# Altium PCB PCB_COF_1.2.PcbDoc
Units mil, origin at the board's own origin, x right, y up, seen from the top; angles counter-clockwise.
Board outline 2760 x 3645 mil, 2 copper layers (Top Layer, Bottom Layer), stack 12.8 mil thick; 59 components, 26 nets, 178 pads, 381 vias.
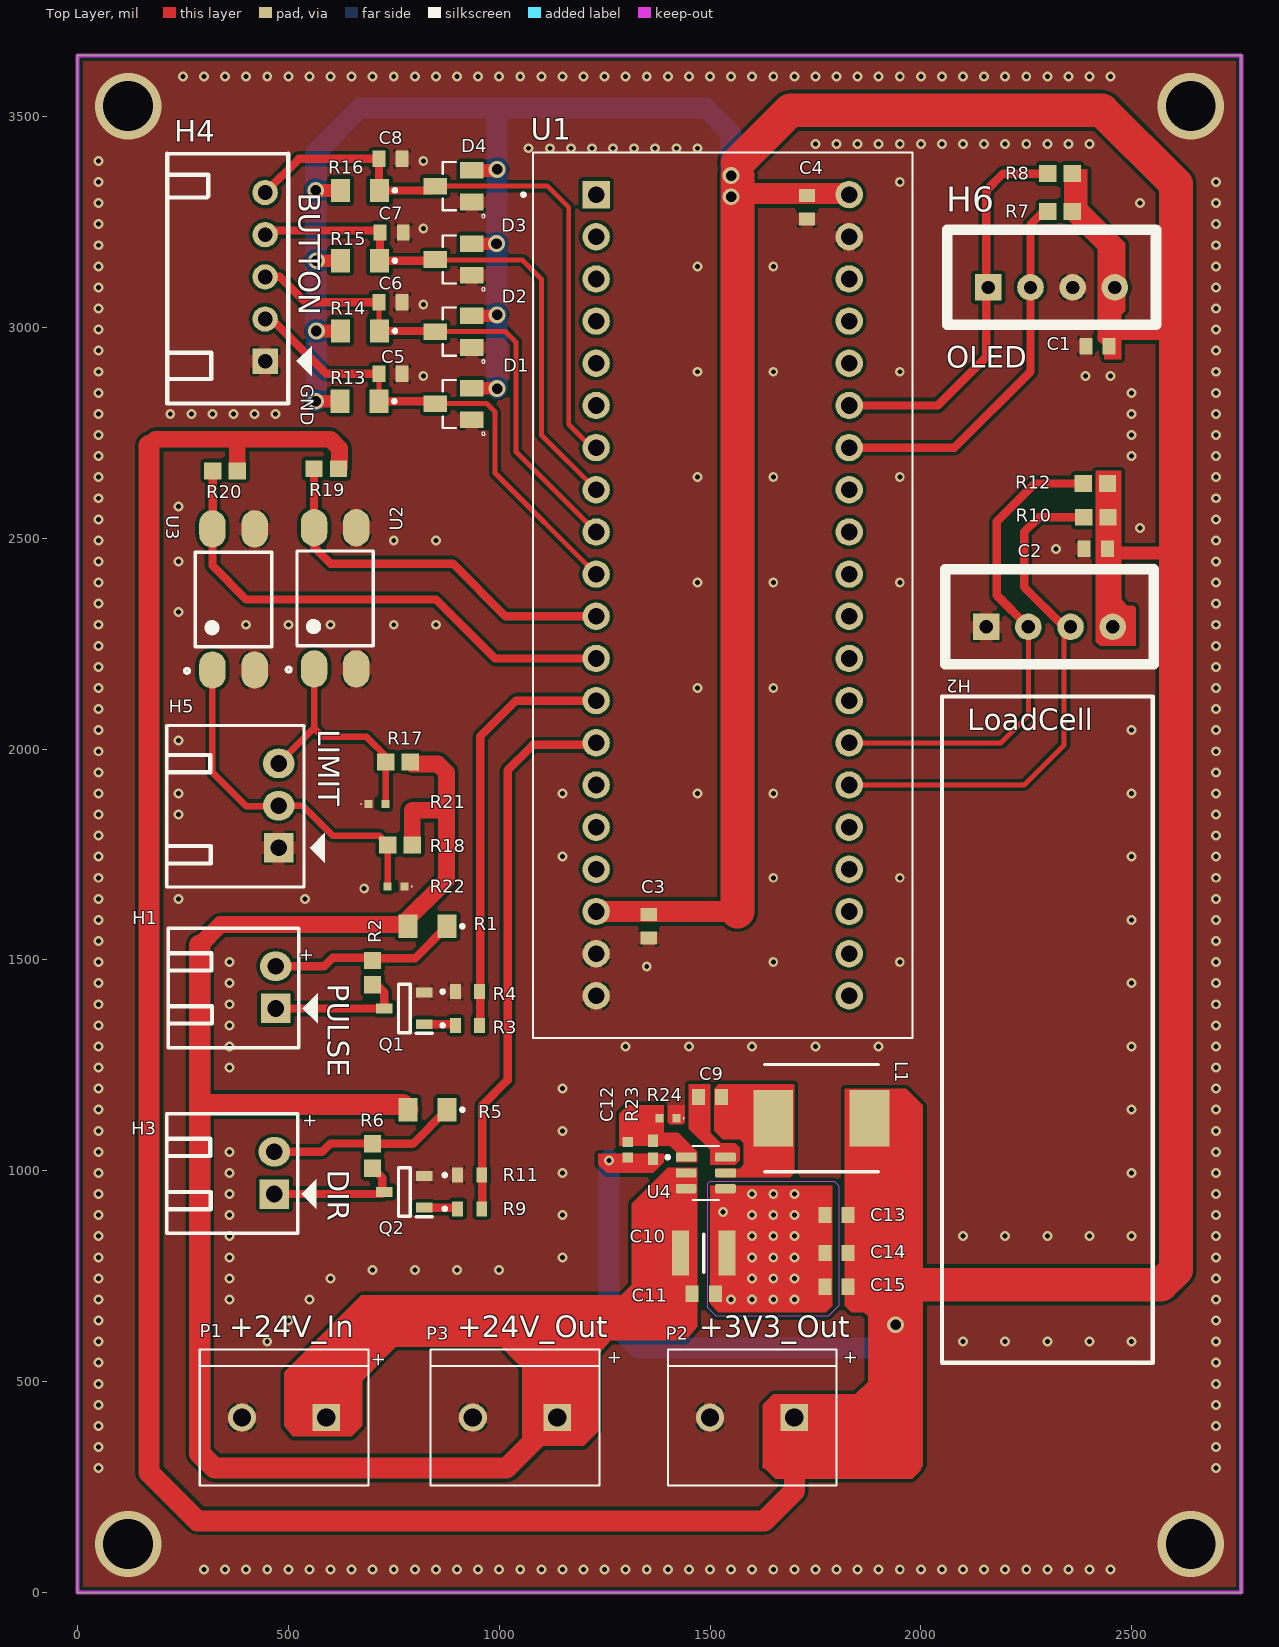
[diagram p0: Top Layer view]
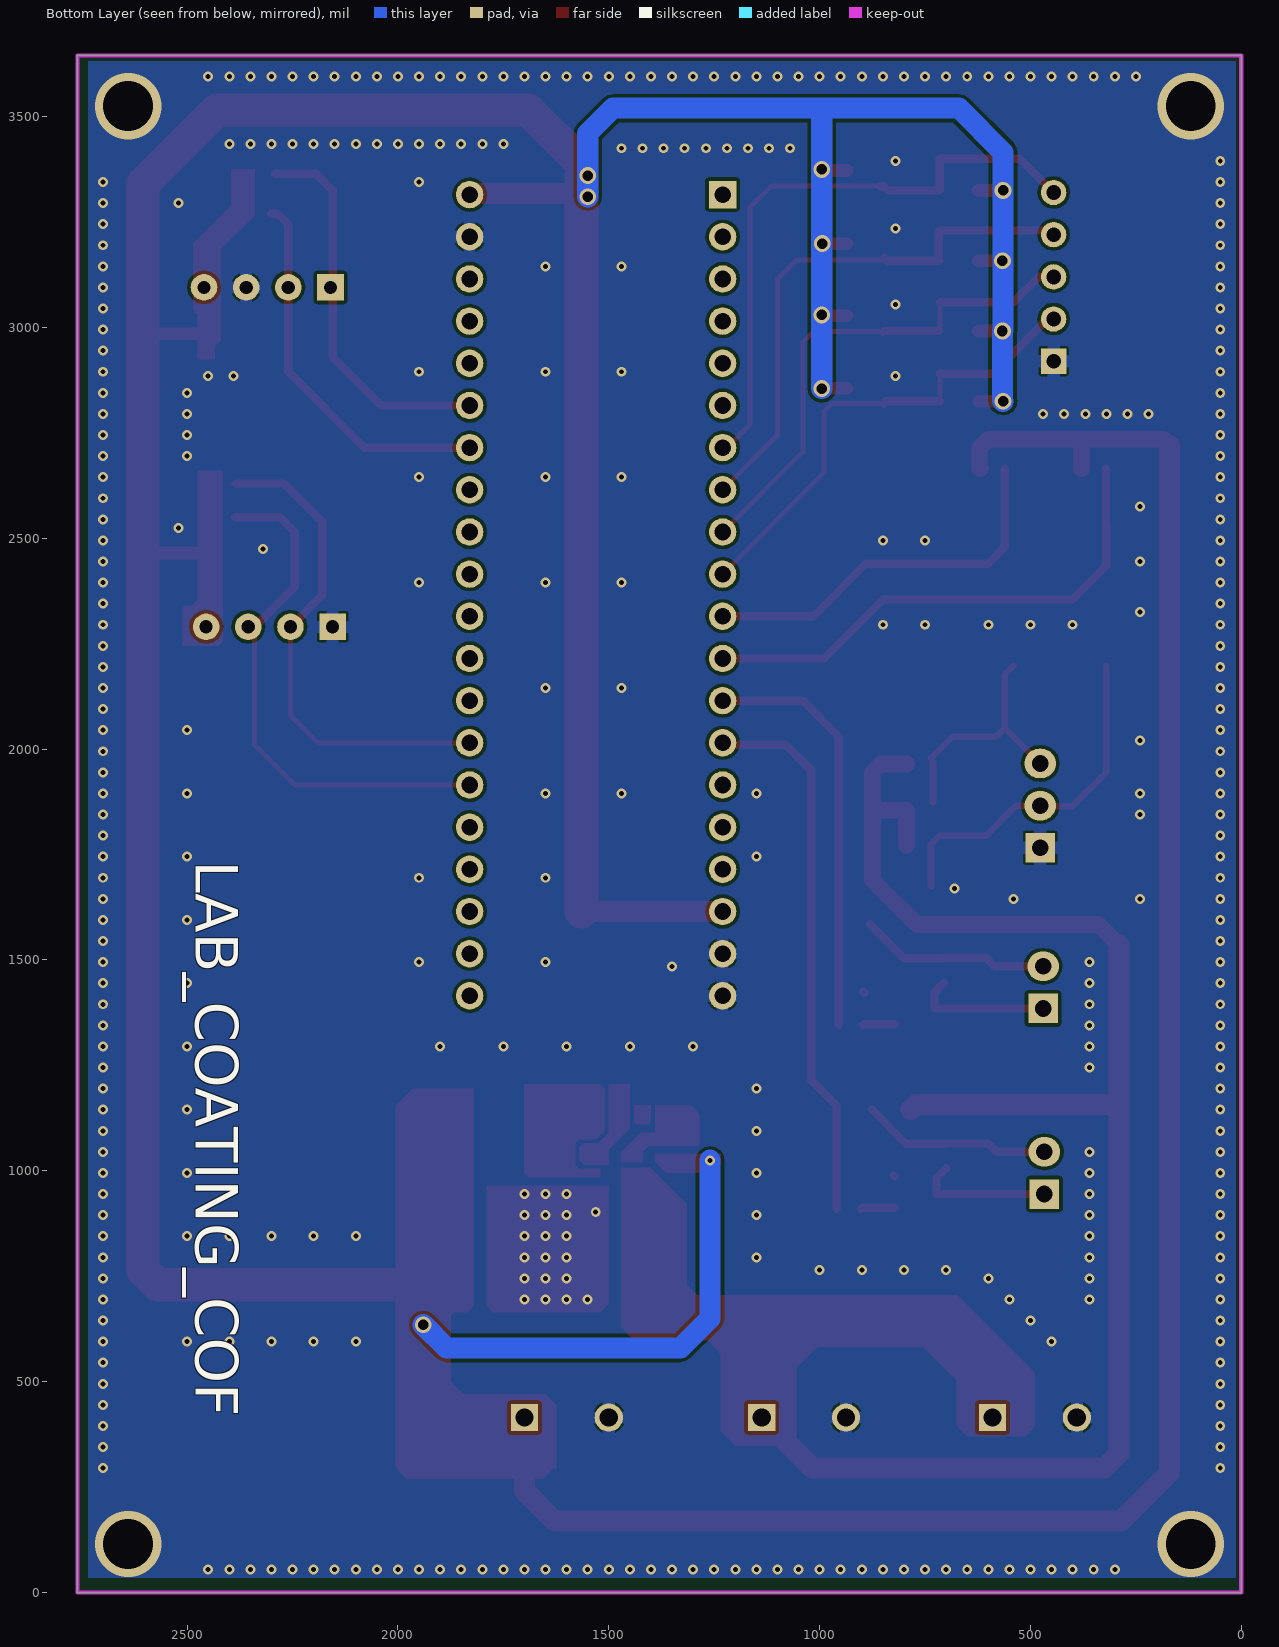
[diagram p1: Bottom Layer view, seen from below]
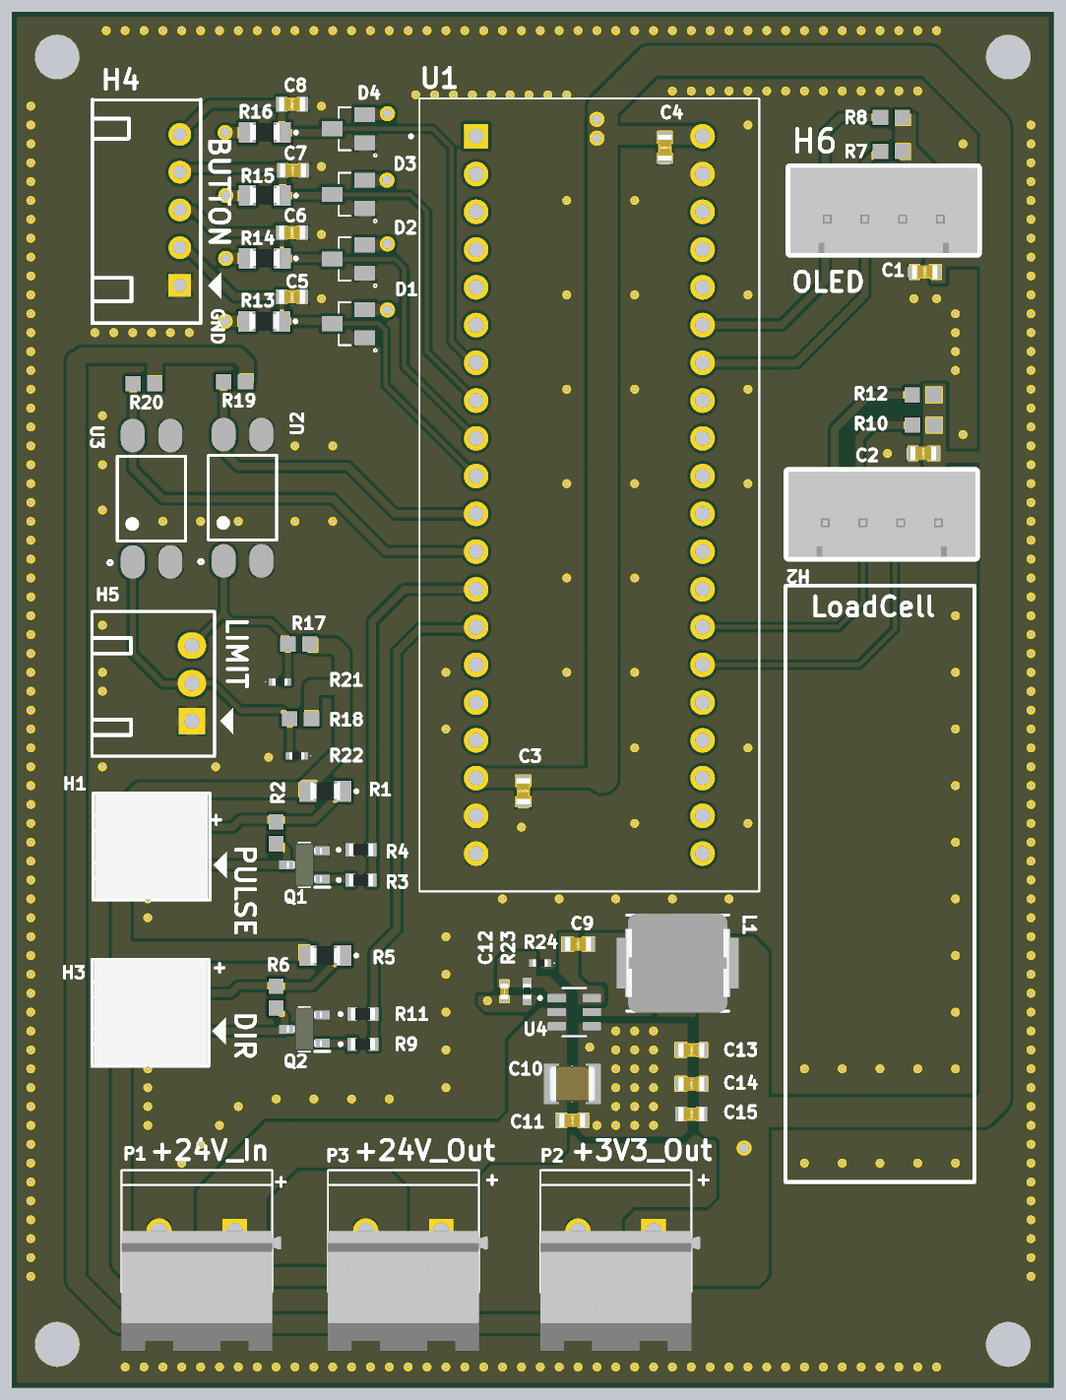
[diagram p2: 3D render of the assembled board from above, using the file's embedded part models]

## Layer stack, top to bottom
Top Solder: solder mask 0.4, Solder Resist, Dk 3.5
Top Layer: signal copper 1.4
Dielectric 1: core 10, FR-4, Dk 4.2
Bottom Layer: signal copper 1.4
Bottom Solder: solder mask 0.4, Solder Resist, Dk 3.5

## Board outline
0,0 2760,0 2760,3645 0,3645

## Design rules (kind name [scope] priority, off if disabled: settings)
Clearance "Clearance_Top overlayer" [OnLayer('Top Overlay') vs IsPad] p1: gap=0 ignorepadtopadclearanceinfootprint=TRUE
Clearance [All] p2: gap=7.87 ignorepadtopadclearanceinfootprint=TRUE except(0: Arc-Text Arc-Hole Track-Text Track-Hole SMDPad-Text SMDPad-Hole THPad-Text THPad-Hole Via-Text Via-Hole Fill-Text Fill-Hole Poly-Text Poly-Hole Region-Text Region-Hole Text-Text Text-Hole)
ComponentClearance ComponentClearance_Resc160 [HasFootprint('RESC1607X60N')] p1: gap=-196.85 collisioncheckmode=3 verticalgap=-196.85 showdistances=FALSE
ComponentClearance ComponentClearance_Res0603 [HasFootprint('RES 0603')] p2: gap=-196.85 collisioncheckmode=3 verticalgap=-196.85 showdistances=FALSE
ComponentClearance ComponentClearance_Diode [HasFootprint('SOT95P240X120-3N')] p3: gap=-196.85 collisioncheckmode=3 verticalgap=-196.85 showdistances=FALSE
ComponentClearance [All] p4: gap=7.87 collisioncheckmode=3 verticalgap=7.87 showdistances=FALSE
HoleSize [All] p1: absolutevalues=TRUE maxlimit=275.59 minlimit=5.91 maxpercent=80.000 minpercent=20.000
HoleToHoleClearance [All] p1: gap=7.87 allowstackedmicrovias=TRUE
MinimumSolderMaskSliver [All] p1: minsoldermaskwidth=0
PlaneConnect [All] p1: planeconnectstyle=Relief reliefexpansion=7.87 reliefentries=4 reliefconductorwidth=30 reliefairgap=7.87
PolygonConnect PolygonConnect_VIA [isVia] p1: connectstyle=Direct reliefconductorwidth=10 reliefentries=4 polygonreliefangle="90 Angle" airgapwidth=10
PolygonConnect "PolygonConnect_header 4p" [(InComponentClass('All Components') AND InNet('GND'))] p2: connectstyle=Relief reliefconductorwidth=30 reliefentries=4 polygonreliefangle="90 Angle" airgapwidth=5
PolygonConnect [All] p3: connectstyle=Relief reliefconductorwidth=10 reliefentries=4 polygonreliefangle="90 Angle" airgapwidth=5
RoutingVias [All] p1: holewidth=25 width=35.43 viastyle="Through Hole" minholewidth=11.81 minwidth=23.62 maxholewidth=196.85 maxwidth=275.59
SilkToSilkClearance [All] p1: silktosilkclearance=0
SilkToSolderMaskClearance [IsPad] p1: minsilkscreentomaskgap=0 clearancetoexposedcopper=TRUE
SolderMaskExpansion [isvia] p1: expansion=-3.94 soldermaskfromhole=TRUE
Width [All] p1: maxlimit=100 minlimit=10 preferedwidth=30
23 further rules are at their usual default settings.

## Classes and differential pairs
component class Sche_MCU_IO: C1 C2 C3 C4 H1 H2 H3 H6 Q1 Q2 R1 R2 R3 R4 R5 R6 R7 R8 R9 R10 R11 R12 U1
component class Sche_PheriperalSchDoc: C5 C6 C7 C8 D1 D2 D3 D4 H4 H5 R13 R14 R15 R16 R17 R18 R19 R20 R21 R22 U2 U3
component class "Sche_Voltage regulator": C9 C10 C11 C12 C13 C14 C15 P1 P2 P3 R23 R24 U4

## Components (designator, comment, footprint, x,y, rotation, side; value= is the part's Value field where it differs from the comment)
C1 "22uF" "C 0603" 2418.91,2955.55 r180 top
C2 "22uF" "C 0603" 2415,2475 r180 top
C3 "22uF" "C 0603" 1355,1580 r90 top
C4 "22uF" "C 0603" 1730,3285 r90 top
C5 "0.1uF" CAPC1608X95N 742.44,2890 r180 top
C6 "0.1uF" CAPC1608X95N 742.44,3060 r180 top
C7 "0.1uF" CAPC1608X95N 745,3225 r180 top
C8 "0.1uF" CAPC1608X95N 742.44,3400 r180 top
C9 "0.1uF" "C 0603" 1500,1175 r0 top
C10 "10uF" CAPC3225X290N 1485,805 r180 top
C11 "0.1uF" "C 0603" 1485,708.38 r180 top
C12 "56pF" CAPC1005X55N 1305,1050 r270 top
C13 "22uF" "C 0603" 1800,895 r0 top
C14 "22uF" "C 0603" 1800,805 r0 top
C15 "0.1uF" CAPC1608X95N 1800,725 r0 top
D1 "BAT54S" SOT95P240X120-3N 891.76,2818.7 r90 top
D2 "BAT54S" SOT95P240X120-3N 891.76,2990 r90 top
D3 "BAT54S" SOT95P240X120-3N 891.76,3161.3 r90 top
D4 "BAT54S" SOT95P240X120-3N 891.76,3335 r90 top
H1 "Pulse" "HEADER 2P DC 2.54" 470,1385.08 r180 top
H2 "HEADER_UART_MODULE" XH2.54M-4 2155,2290 r0 top
H3 "Pulse" "HEADER 2P DC 2.54" 467,945 r180 top locked
H4 "Button_1-4" "HEADER 5P DC 2.54" 445,2920 r180 top locked
H5 "Limit_SW_1-2" "HEADER 3P DC 2.54" 477,1766 r180 top locked
H6 "HEADER_UART_MODULE" XH2.54M-4 2160,3095 r0 top
L1 "4.7uF" INDM6965X300N 1764.17,1125 r0 top
P1 "TERM BLK 2P SIDE ENT 5.08MM PCB - 282837-2" TE_282837-2 490,415 r180 top
P2 "282837-2" TE_282837-2 1600,415 r180 top
P3 "282837-2" TE_282837-2 1037.5,415 r180 top
Q1 "TRANS NPN 45V 0.8A SOT23-3 - BCW66GLT1G" SOT95P237X111-3N 775,1385 r180 top
Q2 "TRANS NPN 45V 0.8A SOT23-3 - BCW66GLT1G" SOT95P237X111-3N 775,950 r180 top
R1 "2.2k" "RES 0805" 830,1580 r180 top
R2 "100k" "RES 0603" 700,1470 r90 top
R3 "1K" ERJ3EKF1000V 925,1345 r0 top
R4 "10K" ERJ3EKF1000V 925,1425 r0 top
R5 "2.2k" "RES 0805" 830,1145 r180 top
R6 "100k" "Res 0603" 700,1035 r90 top
R7 "4.7k" "Res 0603" 2330,3275 r0 top
R8 "4.7k" "Res 0603" 2330,3365 r0 top
R9 "1K" ERJ3EKF1000V 930,910 r0 top
R10 "4.7k" "Res 0603" 2415,2550 r0 top
R11 "10K" ERJ3EKF1000V 930,990 r0 top
R12 "4.7k" "Res 0603" 2413.94,2630 r0 top
R13 "2.2K" "RES 0805" 668.74,2825 r180 top
R14 "2.2K" "RES 0805" 670,2991.67 r180 top
R15 "2.2K" "RES 0805" 670,3158.33 r180 top
R16 "2.2K" "RES 0805" 670,3325 r180 top
R17 "9k1" "RES 0603" 760,1970 r0 top
R18 "9k1" "RES 0603" 765,1772.19 r0 top
R19 "4.7K" "Res 0603" 590,2665 r0 top
R20 "4.7K" "Res 0603" 350,2660 r0 top
R21 "100K" ERJ2RKD1004X 709.84,1870 r0 top
R22 "100K" ERJ2RKD1004X 755,1674.39 r180 top
R23 "93.1k" RESC1005X40N 1365,1050 r270 top
R24 "30.1k" ERJ2RKD1004X 1400,1125 r180 top
U1 "MODULE STM32F103C8T6 - ZC323000" MODULE_ZC323000 1530,2365 r0 top
U2 "OPTOISOLATOR 5KV TRANS 4SMD - PC817X2NIP0F" SOT254P975X400-4N 611.06,2357.73 r90 top
U3 "OPTOISOLATOR 5KV TRANS 4SMD - PC817X2NIP0F" SOT254P975X400-4N 370,2355 r90 top
U4 "IC REG BUCK ADJUSTABLE 2A TSOT26 - AP63300WU-7" SOT95P280X100-6N 1490,995 r0 top

## Footprints (in the part's own frame and the unit in brackets; to place one, negate y for a bottom-side part, rotate by r counter-clockwise, add the part's x,y. Pads: shape width x height; smd on the part's side, far side on the other; paste and mask are expansions set on the pad)
"C 0603" [mm]
  rect 0.78x0.98 smd mask+0.051: 1(-0.7,0) 2(0.7,0)
  body extent -0.87,-0.48 0.88,0.47, height 0.87
CAPC1005X55N [mm]
  rect 0.6x0.62 smd mask+0.051: 1(-0.46,0) 2(0.46,0)
  body extent -0.52,-0.28 0.53,0.27, height 0.55
CAPC1608X95N [mm]
  rect 0.78x0.98 smd: 1(-0.7,0) 2(0.7,0)
  body extent -0.87,-0.48 0.88,0.47, height 0.87
CAPC3225X290N [mm]
  rect 1.02x2.72 smd: 1(-1.4,0) 2(1.4,0)
  silkscreen extent 0,-1.15 0,1.15, body extent -1.6,-1.25 1.6,1.25, height 2.9
ERJ2RKD1004X [mm]
  rect 0.475x0.5 smd: 1(-0.512,0) 2(0.512,0)
  silkscreen extent -0.97,-0.03 -0.93,0.03, body extent -0.5,-0.25 0.5,0.25, height 0.35
ERJ3EKF1000V [mm]
  rect 0.65x0.9 smd: 1(-0.725,0) 2(0.725,0)
  silkscreen extent -1.6,-0.1 -1.4,0.1, body extent -0.8,-0.4 0.8,0.4, height 0.45
"HEADER 2P DC 2.54" [mil]
  rect 70x70 hole 39.37: 1(0,0)
  oval 75x70 hole 39.37: 2(0,-100)
  silkscreen extent -100,-190 255,93, body extent -50,-190 250,90, height 237
"HEADER 3P DC 2.54" [mil]
  rect 70x70 hole 39.37 unplated: 1(0,0)
  oval 75x70 hole 39.37: 2(0,-100) 3(0,-200)
  silkscreen extent -110,-290 265,93
"HEADER 5P DC 2.54" [mil]
  rect 60x60 hole 35: 1(0,0)
  round 60 hole 35: 2(0,-100) 3(0,-200) 4(0,-300) 5(0,-400)
  silkscreen extent -110,-492 232,100
INDM6965X300N [mm]
  rect 2.4x3.4 smd: 1(-2.9,0) 2(2.9,0)
  silkscreen extent -3.43,-3.23 3.43,3.23, body extent -3.54,-3.33 3.53,3.34, height 2.89
MODULE_ZC323000 [mil]
  rect 65x65 hole 39.37: 1(-300,950)
  round 65 hole 39.37: 2(-300,850) 3(-300,750) 4(-300,650) 5(-300,550) 6(-300,450) 7(-300,350) 8(-300,250) 9(-300,150) 10(-300,50) 11(-300,-50) 12(-300,-150) 13(-300,-250) 14(-300,-350) 15(-300,-450) 16(-300,-550) 17(-300,-650) 18(-300,-750) 19(-300,-850) 20(-300,-950) 21(300,-950) 22(300,-850) 23(300,-750) 24(300,-650) 25(300,-550) 26(300,-450) 27(300,-350) 28(300,-250) 29(300,-150) 30(300,-50) 31(300,50) 32(300,150) 33(300,250) 34(300,350) 35(300,450) 36(300,550) 37(300,650) 38(300,750) 39(300,850) 40(300,950)
  silkscreen extent -476,-1050 450,1050
"RES 0603" [mm]
  rect 1.04x1.02 smd mask+0.076: 1(-0.735,0) 2(0.735,0)
"Res 0603" [mm]
  rect 1.04x1.02 smd mask+0.076: 1(-0.735,0) 2(0.735,0)
"RES 0805" [mm]
  rect 1.15x1.4 smd mask+0.076: 1(-1.175,0) 2(1.175,0)
  silkscreen extent -2.2,-0.1 -2,0.1, body extent -1,-0.62 1,0.63, height 0.6
RESC1005X40N [mm]
  rect 0.75x0.6 smd: 1(-0.55,0) 2(0.55,0)
  body extent -0.5,-0.25 0.5,0.25, height 0.4
SOT95P237X111-3N [mm]
  rect 1x0.6 smd: 1(-1.2,0.95) 2(-1.2,-0.95) 3(1.2,0)
  silkscreen extent -1.7,-1.46 0.35,1.5, body extent -1.18,-1.46 1.19,1.46, height 1.11
SOT95P240X120-3N [mm]
  rect 1x1.4 smd: 1(-0.95,-1.1) 2(0.95,-1.1) 3(0,1.1)
  silkscreen extent -1.9,-1.9 1.45,0.65
SOT95P280X100-6N [mm]
  rrect25% 1.24x0.55 smd: 1(-1.185,0.95) 2(-1.185,0) 3(-1.185,-0.95) 4(1.185,-0.95) 5(1.185,0) 6(1.185,0.95)
  silkscreen extent -2.4,-1.62 0.8,1.62
SOT254P975X400-4N [mm]
  oval 2.25x1.6 smd: 1(-4.25,1.27) 2(-4.25,-1.27) 3(4.25,-1.27) 4(4.25,1.27)
  silkscreen extent -4.44,-2.3 2.85,2.94
TE_282837-2 [mm]
  rect 1.65x1.65 / inner round 1.65 / far side rect 1.65x1.65 hole 1.1: 1(-2.54,0)
  round 1.7 hole 1.1: 2(2.54,0)
  silkscreen extent -5.08,-4.1 5.08,4.1, body extent -5.68,0 5.08,8.2, height 7.25
XH2.54M-4 [mm]
  rect 1.6x1.6 hole 0.8: 1(0,0)
  round 1.6 hole 0.8: 2(2.54,0) 3(5.08,0) 4(7.62,0)
  silkscreen extent -2.48,-2.26 10.1,3.46, body extent -2.48,-2.26 10.1,3.48, height 6.91

## Part data
C1 C2 C3 C4 C13 C14: library part "CAP CER 22UF 6.3V X5R 0603 - GRM188R60J226MEA0D", "CAP CER 22UF 6.3V X5R 0603", =6.3V, Catalog=GRM188R60J226MEA0D
C5 C6 C7 C8 C15: library part "CAP CER 0.1UF 10V X7R 0603 - C0603C104K8RACTU", "Multilayer Ceramic Capacitors MLCC - SMD/SMT", Manufacturer_Name=KEMET, Manufacturer_Part_Number=C0603C104K8RACTU/1K, Mouser Part Number=N/A, =10V, Datasheet Link=https://api.kemet.com/component-edge/download/specsheet/C0603C104K8RACTU.pdf, Geometry.Height=0.95mm, Mouser Price/Stock=https://www.mouser.com/Search/Refine.aspx?Keyword=N%2FA
C9 C11: library part "CAP CER 0.1UF 50V X7R 0603 - ESD35C104K4T2A-24", "CAP CER 0.1UF 50V X7R 0603", =50V, Catalog=ESD35C104K4T2A-24
C10: library part "CAP CER 10UF 50V Y5V 1210 - 12105G106ZAT2A", "CAP CER 10UF 50V Y5V 1210", Manufacturer_Name=AVX, Manufacturer_Part_Number=12105G106ZAT2A/500, =50V, Datasheet Link=http://datasheets.avx.com/Y5V.pdf, Geometry.Height=2.9mm
C12: library part "CAP CER 56PF 50V C0G/NPO 0402 - CC0402JRNPO9BN560", "CAP CER 56PF 50V C0G/NPO 0402", Arrow Part Number=CC0402JRNPO9BN560, Manufacturer_Name=KEMET, =50V, Arrow Price/Stock=https://www.arrow.com/en/products/cc0402jrnpo9bn560/yageo, Datasheet Link=https://www.yageo.com/upload/media/product/productsearch/datasheet/mlcc/UPY-GP_NP0_16V-to-50V_18.pdf, Geometry.Height=0.55mm, Manufacturer_Part_Number=CC0402JRNPO9BN560
D1 D2 D3 D4: library part "DIODE SCHOTTKY 30V 150MA SOT23  - BAT54S", "DIODE SCHOTTKY 30V 150MA SOT23", Package=None, Availability=Unavailable, MP=BAT54S, Price=None
H1 H3: library part "Header 2P 2.54 Duc Cong", "C?m", Chung_Loai=C?m, Don_Vi=Con, Ma_Hang=MH002852, Ten_Linh_Kien="Header 2P XH2.54-2P Ð?c Cong"
H2 H6: library part "Header 4P 2.54 Duc Thang", "C?m", Chung_Loai=C?m, Don_Vi=Con, Ma_Hang=MH001285, Ten_Linh_Kien="Header 4P XH2.54-4P Ð?c Th?ng"
H4: library part "Header 5P 2.54 Duc Cong", "C?m", Chung_Loai=C?m, Don_Vi=Con, Ma_Hang=MH001308, Ten_Linh_Kien="Header 5P XH2.54-5P Ð?c Cong"
H5: library part "Header 3P 2.54 Duc Cong", "C?m", Chung_Loai=C?m, Don_Vi=Con, Ma_Hang=MH001302, Ten_Linh_Kien="Header 3P XH2.54-3P Ð?c Cong"
L1: library part "IND 4.7UH 5.5A 40 MOHM SMD - IHLP2525CZER4R7M01", "FIXED IND 4.7UH 5.5A 40 MOHM SMD", Arrow Part Number=IHLP2525CZER4R7M01, Manufacturer_Name=Vishay, Mouser Part Number=70-IHLP2525CZER4R7M1, =5.5A, Arrow Price/Stock=https://www.arrow.com/en/products/ihlp2525czer4r7m01/vishay?region=europe, Datasheet Link=https://componentsearchengine.com/Datasheets/2/IHLP2525CZER4R7M01.pdf, Geometry.Height=3mm, Manufacturer_Part_Number=IHLP2525CZER4R7M01, Mouser Price/Stock=https://www.mouser.co.uk/ProductDetail/Vishay-Dale/IHLP2525CZER4R7M01?qs=delkvkPykKkoRC4%2FTC3qyQ%3D%3D
P1: "TERM BLK 2P SIDE ENT 5.08MM PCB", Package=None, Availability="In Stock", Check_prices=https://www.snapeda.com/parts/282837-2/TE+Connectivity+AMP+Connectors/view-part/?ref=eda, Comment_1=TER_+24V_Output, MF="TE Connectivity", MP=282837-2, Price=None, Purchase-URL=https://pricing.snapeda.com/search/part/282837-2/?ref=eda, SnapEDA_Link=https://www.snapeda.com/parts/282837-2/TE+Connectivity+AMP+Connectors/view-part/?ref=snap
P2 P3: "Connector Terminal Blocks Receptacle 2 Position 5.08mm Solder Straight Thru-Hole 13.5A/Contact", Package=None, Availability="In Stock", Check_prices=https://www.snapeda.com/parts/282837-2/TE+Connectivity+AMP+Connectors/view-part/?ref=eda, MF="TE Connectivity", MP=282837-2, Price=None, Purchase-URL=https://pricing.snapeda.com/search/part/282837-2/?ref=eda, SnapEDA_Link=https://www.snapeda.com/parts/282837-2/TE+Connectivity+AMP+Connectors/view-part/?ref=snap
  P2: Comment_1=TER_+3.3V_Output
  P3: Comment_1=+24V
Q1 Q2: "TRANS NPN 45V 0.8A SOT23-3", Arrow Part Number=BCW66GLT1G, Manufacturer_Name=onsemi, Mouser Part Number=863-BCW66GLT1G, Arrow Price/Stock=https://www.arrow.com/en/products/bcw66glt1g/on-semiconductor?region=nac, Datasheet Link=http://www.onsemi.com/pub/Collateral/BCW66GLT1-D.PDF, Geometry.Height=1.11mm, Manufacturer_Part_Number=BCW66GLT1G, Mouser Price/Stock=https://www.mouser.co.uk/ProductDetail/onsemi/BCW66GLT1G?qs=R2UZ7gjkEjKs0bN2RlXbWw%3D%3D
R1 R5 R13 R14 R15 R16: library part "RES SMD 2.2K OHM 5% 1/2W 0805 - ERJ-P06J222V", "RES SMD 2.2K OHM 5% 1/2W 0805", MF=PANASONIC, MP=ERJ-P06J222V
R2 R6: library part "RES SMD 100K OHM 1% 1/10W 0603 - CRCW0603100KFKEA", "RES SMD 100K OHM 1% 1/10W 0603", MF=Yageo, MP=CRCW0603100KFKEA
R3 R9: library part "RES SMD 1K OHM 5% 1/10W 0603 - ERJ-3GEYJ102V", "RES SMD 1K OHM 5% 1/10W 0603", Arrow Part Number=ERJ-3GEYJ102V, Manufacturer_Name=Panasonic, Mouser Part Number=667-ERJ-3GEYJ102V, Arrow Price/Stock=https://www.arrow.com/en/products/erj-3geyj102v/panasonic?region=nac, Datasheet Link=http://docs-europe.electrocomponents.com/webdocs/13ba/0900766b813ba21b.pdf, Geometry.Height=0.55mm, Manufacturer_Part_Number=ERJ-3GEYJ102V, Mouser Price/Stock=https://www.mouser.co.uk/ProductDetail/Panasonic/ERJ-3GEYJ102V?qs=66DK8nO8gJBFiTsClorqsA%3D%3D
R4 R11: library part "RES SMD 10K OHM 5% 1/10W 0603 - ERJ3GEYJ103V", "RES SMD 10K OHM 5% 1/10W 0603", Manufacturer_Name=Panasonic, Manufacturer_Part_Number=ERJ3GEYJ103V, Mouser Part Number=667-ERJ-3GEYJ103V, Datasheet Link=http://docs-europe.electrocomponents.com/webdocs/13ba/0900766b813ba21b.pdf, Geometry.Height=0.55mm, Mouser Price/Stock=http://www.mouser.com/Search/ProductDetail.aspx?qs=66DK8nO8gJBWgc%252b0VNNxzg%3d%3d
R7 R8 R10 R12 R19 R20: library part "RES 4.7K OHM 1% 1/10W 0603 - RC0603FR-074K7L", "RES 4.7K OHM 1% 1/10W 0603", Package="0603 Yageo", Availability=Unavailable, MF=Yageo, MP=RC0603FR-074K7L, Price=None, SnapEDA_Link=https://www.snapeda.com/parts/RC0603FR-074K7L/Yageo/view-part/473520/?ref=snap
R17 R18: library part "RES SMD 9.1K OHM 1% 1/10W 0603 - ERJ-3EKF9101V", "RES SMD 9.1K OHM 1% 1/10W 0603", MF=Panasonic, MP=ERJ-3EKF9101V
R21 R22: library part "RES SMD 100K OHM 1% 1/10W 0402 - ERJ2RKF1003X", "RES SMD 100K OHM 1% 1/10W 0402", Manufacturer_Name=Panasonic, Manufacturer_Part_Number=ERJ2RKF1003X, =0.1W, Datasheet Link=http://docs-europe.electrocomponents.com/webdocs/13ba/0900766b813ba21b.pdf, Geometry.Height=0.4mm
R23: library part "RES 93.1K OHM 1% 1/16W 0402 - RC0402FR-0793K1L", "RES 93.1K OHM 1% 1/16W 0402", Manufacturer_Name=KEMET, Manufacturer_Part_Number=RC0402FR-0793K1L, Mouser Part Number=603-RC0402FR-0793K1L, Datasheet Link=http://www.yageo.com/documents/recent/PYu-RC0402_51_RoHS_L_6_r.pdf, Geometry.Height=0.4mm
R24: library part "RES SMD 30.1K OHM 1% 1/10W 0402 - ERJ-2RKF3012X", "RES SMD 30.1K OHM 1% 1/10W 0402", Manufacturer_Name=Panasonic, Manufacturer_Part_Number=ERJ-2RKF3012X, Mouser Part Number=667-ERJ-2RKF3012X, Datasheet Link=https://industrial.panasonic.com/cdbs/www-data/pdf/RDA0000/AOA0000C86.pdf, Geometry.Height=0.4mm, Mouser Price/Stock=https://www.mouser.co.uk/ProductDetail/Panasonic/ERJ-2RKF3012X?qs=YMBIwoNQYdWdJYigM0pxkw%3D%3D
U1: "MODULE STM32F103C8T6", Package=None, Availability=Unavailable, MP=ZC323000, Price=None
U2 U3: "Optoisolator Transistor Output 5000Vrms 1 Channel 4-SMD", Package="SMD-4 Sharp", Check_prices=https://www.snapeda.com/parts/PC817X2NIP0F/Sharp+Microelectronics/view-part/?ref=eda, Digi-Key_Part_Number=425-2192-2-ND, MF="Sharp Microelectronics", MP=PC817X2NIP0F, Purchase-URL=https://pricing.snapeda.com/search/part/PC817X2NIP0F/?ref=eda, SnapEDA_Link=https://www.snapeda.com/parts/PC817X2NIP0F/Sharp+Microelectronics/view-part/?ref=snap
U4: "IC REG BUCK ADJUSTABLE 2A TSOT26", Package="SOT-23-6 Diodes Incorporated", Availability=Unavailable, DigiKey-Purchase-URL=https://snapeda.com/shop?store=DigiKey&id=4221814, MF="Diodes Incorporated", MP=AP63300WU-7, Price=None, SnapEDA_Link=https://www.snapeda.com/parts/AP63300WU-7/Diodes%20Inc./view-part/4221814/?ref=snap

## Via types
v1: diameter 23.62, hole 11.81, Top Layer to Bottom Layer, 366 vias
v2: diameter 40, hole 25, Top Layer to Bottom Layer, 11 vias
v3: diameter 157.48, hole 118.11, Top Layer to Bottom Layer, 4 vias

## Nets (pads, with @x,y where several pads share a name; then routed paths per layer and width w, separated by ;. In a path a pad name is that pad's centre, name@x,y a point inside that pad or via, vN(x,y) a via of type N, cw(c..) or ccw(c..) an arc to the next point about the centre after c; other vN are vias at no path point)
+3.3V: C1.1 C2.1 C3.2 C4.2 C12.2 C13.2 C14.2 C15.2 D1.2 D2.2 D3.2 D4.2 H2.4 H6.4 L1.2 P2.1 R7.2 R8.2 R10.2 R12.2 R13.2 R14.2 R15.2 R16.2 R19.2 R20.2 R23.2 U1.18 U1.40 | length 15864.2
  Top Layer w30: v2(565,2825) R13.2 ; v2(565,3325) R16.2 ; v2(566.67,2991.67) R14.2 ; v2(566.67,3158.33) R15.2 ; D1.2 993.9,2856.1 v2(995,2855) ; D2.2 992.4,3027.4 v2(995,3030) ; D3.2 v2(993.7,3198.7) ; D4.2 992.4,3372.4 v2(995,3375) ; U1.40@1827.32,3317.68 U1.40 ; C2.1@2451.1,2470 2456.1,2465 2605,2465 ; 2452.68,2980 2457.68,2985 2605,2985
  Top Layer w40: 170,2720 185,2735 375,2735 ; R20.2@378.94,2665 378.94,2731.06 375,2735 ; R19.2 621.63,2667.69 621.63,2713.37 600,2735 375,2735
  Top Layer w50: 170,2720 170,285 285,170 1628.63,170 1700,241.37 P2.1 ; U1.18 1565,1615 ; v2@1565,3317.68 U1.40@1827.32,3317.68
  Top Layer w80: 1565,1615 v2@1565,3310 ; v2@1565,3317.68 v2@1565,3360 ; 1565,3390 1690,3515 2430,3515 2605,3340 2605,2985 2605,2465 2605,765 2570,730 1960,730
  Bottom Layer w50: v2(565,2825) 566.67,2826.67 v2(566.67,2991.67) 565,2993.33 v2(565,3325) 565,3415 670,3520 1490,3520 1550,3460 v2(1550,3360) v2(1550,3310) ; v2(995,2855) v2(995,3030) v2(995,3375) 995,3495 ; v1(1260,1025) 1260,650 1330,580 1885,580 v2(1940,635)
+24V: C10.2 C11.2 P1.1 P3.1 R1.2 R5.2 R17.2 R18.2 U4.2 U4.3 | length 3773.4
  Top Layer w40: 290,1535 338.74,1583.74 769.74,1583.74 875,1689 875,1855 ; R18.2 793.94,1855 875,1855 ; R17.2@793.94,1965 855,1965 875,1945 875,1855
  Top Layer w50: 290,1535 290,1157 ; R5.2 771.74,1157 290,1157 ; P3.1 1017.5,295 325,295 290,330 290,1157
"- Dir": R9.2 R11.2 U1.14 | length 1301.8
  Top Layer w20: R9.2@960,910 960,1155 1020,1215 1020,1950 1080,2010 1225,2010 U1.14
"- Pulse": R3.2 R4.2 U1.13 | length 995.2
  Top Layer w20: R3.2@955,1345 955,2030 1040,2115 U1.13
Button_1: C8.2 D4.3 H4.5 R16.1 U1.7 | length 1455
  Top Layer w11.81: D4.3@856.69,3335 1115,3335 1165,3285 1165,2770 1220,2715 U1.7
  Top Layer w19.68: H4.5 525,3400 C8.2 714.88,3326.38 R16.1 838.45,3325 D4.3 D4.3@856.69,3335
Button_2: C7.2 D3.3 H4.4 R15.1 U1.8 | length 1307.7
  Top Layer w11.81: D3.3@846.69,3160 1055,3160 1100,3115 1100,2745 U1.8
  Top Layer w19.68: H4.4 455,3230 717.44,3230 C7.2 717.44,3159.51 R15.1 840.03,3158.33 D3.3@846.69,3165
Button_3: C6.2 D2.3 H4.3 R14.1 U1.9 | length 1227.1
  Top Layer w11.81: C6.2 714.88,2993.04 R14.1 ; D2.3@850,2990 1015,2990 1040,2965 1040,2705 U1.9
  Top Layer w19.68: H4.3 480,3120 540,3060 C6.2
  Top Layer w20: R14.1 848.33,2991.67 D2.3@850,2990
Button_4: C5.2 D1.3 H4.2 R13.1 U1.10 | length 1157.5
  Top Layer w11.81: C5.2 714.88,2825.12 R13.1 ; D1.3@850,2820 970,2820 990,2800 990,2655 U1.10
  Top Layer w19.68: H4.2 460,3020 590,2890 C5.2
  Top Layer w20: R13.1 842.15,2825 D1.3
GND: C1.2 C2.2 C3.1 C4.1 C5.1 C6.1 C7.1 C8.1 C10.1 C11.1 C13.1 C14.1 C15.1 D1.1 D2.1 D3.1 D4.1 H2.1 H4.1 H5.1 H6.3 P1.2 P2.2 P3.2 Q1.2 Q2.2 R4.1 R11.1 R21.1 R22.1 R24.1 U1.19 U1.20 U1.39 U2.2 U2.3 U3.2 U3.3 U4.4 | length 7.3
  Top Layer w20: Q2.2 Q2.2@824.84,990 ; R4.1@893.86,1422.4 R4.1
  other v1: 300,55 350,55 400,55 450,55 500,55 550,55 600,55 650,55 700,55 750,55 800,55 850,55 900,55 950,55 1000,55 1050,55 1100,55 1150,55 1200,55 1250,55 1300,55 1350,55 1400,55 1450,55 1500,55 1550,55 1600,55 1650,55 1700,55 1750,55 1800,55 1850,55 1900,55 1950,55 2000,55 2050,55 2100,55 2150,55 2200,55 2250,55 2300,55 2350,55 2400,55 2450,55 50,295 2700,295 50,345 2700,345 50,395 2700,395 50,445 2700,445 50,495 2700,495 50,545 2700,545 50,595 450,595 2100,595 2200,595 2300,595 2400,595 2500,595 2700,595 50,645 500,645 2700,645 50,695 360,695 550,695 1550,695 1600,695 1650,695 1700,695 2700,695 50,745 360,745 600,745 1600,745 1650,745 1700,745 2700,745 700,765 800,765 900,765 1000,765 50,795 360,795 1150,795 1600,795 1650,795 1700,795 2700,795 50,845 360,845 1600,845 1650,845 1700,845 2100,845 2200,845 2300,845 2400,845 2500,845 2700,845 50,895 360,895 1150,895 1600,895 1650,895 1700,895 2700,895 1531,902 50,945 360,945 1600,945 1650,945 1700,945 2700,945 50,995 360,995 1150,995 2500,995 2700,995 50,1045 360,1045 2700,1045 50,1095 1150,1095 2700,1095 50,1145 2500,1145 2700,1145 50,1195 1150,1195 2700,1195 50,1245 360,1245 2700,1245 50,1295 360,1295 1300,1295 1450,1295 1600,1295 1750,1295 1900,1295 2500,1295 2700,1295 50,1345 360,1345 2700,1345 50,1395 360,1395 2700,1395 50,1445 360,1445 2500,1445 2700,1445 1350,1485 50,1495 360,1495 1650,1495 1950,1495 2700,1495 50,1545 2700,1545 50,1595 2500,1595 2700,1595 50,1645 240,1645 540,1645 2700,1645 680,1670 50,1695 1650,1695 1950,1695 2700,1695 50,1745 1150,1745 2500,1745 2700,1745 50,1795 2700,1795 50,1845 240,1845 2700,1845 50,1895 240,1895 1150,1895 1470,1895 1650,1895 2500,1895 2700,1895 50,1945 2700,1945 50,1995 2700,1995 240,2020 50,2045 2500,2045 2700,2045 50,2095 2700,2095 50,2145 1470,2145 1650,2145 2700,2145 50,2195 2700,2195 50,2245 2700,2245 50,2295 400,2295 500,2295 600,2295 750,2295 850,2295 2700,2295 240,2325 50,2345 2700,2345 50,2395 1470,2395 1650,2395 1950,2395 2700,2395 50,2445 240,2445 2700,2445 2320,2475 50,2495 750,2495 850,2495 2700,2495 2520,2525 50,2545 2700,2545 240,2575 50,2595 2700,2595 50,2645 1470,2645 1650,2645 1950,2645 2700,2645 50,2695 2500,2695 2700,2695 50,2745 2500,2745 2700,2745 50,2795 220,2795 270,2795 320,2795 370,2795 420,2795 470,2795 2500,2795 2700,2795 50,2845 2500,2845 2700,2845 820,2885 2390,2885 2450,2885 50,2895 1470,2895 1650,2895 1950,2895 2700,2895 50,2945 2700,2945 50,2995 2700,2995 50,3045 2700,3045 820,3055 50,3095 2700,3095 50,3145 1470,3145 1650,3145 2700,3145 50,3195 2700,3195 820,3235 50,3245 2700,3245 50,3295 2520,3295 2700,3295 50,3345 1950,3345 2700,3345 50,3395 820,3395 1070,3425 1120,3425 1170,3425 1220,3425 1270,3425 1320,3425 1370,3425 1420,3425 1470,3425 1750,3435 1800,3435 1850,3435 1900,3435 1950,3435 2000,3435 2050,3435 2100,3435 2150,3435 2200,3435 2250,3435 2300,3435 2350,3435 2400,3435 250,3595 300,3595 350,3595 400,3595 450,3595 500,3595 550,3595 600,3595 650,3595 700,3595 750,3595 800,3595 850,3595 900,3595 950,3595 1000,3595 1050,3595 1100,3595 1150,3595 1200,3595 1250,3595 1300,3595 1350,3595 1400,3595 1450,3595 1500,3595 1550,3595 1600,3595 1650,3595 1700,3595 1750,3595 1800,3595 1850,3595 1900,3595 1950,3595 2000,3595 2050,3595 2100,3595 2150,3595 2200,3595 2250,3595 2300,3595 2350,3595 2400,3595 2450,3595
  other v3: 120,115 2640,115 120,3525 2640,3525
Limit_SW_1: R19.1 U1.11 U2.4 | length 922.9
  Top Layer w19.68: R19.1 U2.4 561.01,2525 561.01,2478.99 600,2440 890,2440 1015,2315 U1.11
Limit_SW_2: R20.1 U1.12 U3.4 | length 1231.6
  Top Layer w19.68: R20.1@321.06,2665 R20.1 321.06,2533.39 320,2532.32 U3.4 320,2435 400,2355 850,2355 990,2215 U1.12
NetC9_1: C9.1 U4.6
NetC9_2: C9.2 L1.1 U4.5
NetC12_1: C12.1 R23.1 R24.2 U4.1
NetH1_1: H1.1 Q1.3 R2.1 | length 326.2
  Top Layer w19.68: H1.1@472,1385 Q1.3 727.76,1423.31 R2.1@705,1446.06
NetH1_2: H1.2 R1.1 R2.2 | length 451.6
  Top Layer w19.68: H1.2@472,1485 585,1485 605,1505 703.94,1505 705,1503.94 800.2,1503.94 R1.1 R1.1@881.26,1585
NetH3_1: H3.1 Q2.3 R6.1 | length 326.2
  Top Layer w19.68: H3.1 722.76,945 722.76,983.31 R6.1
NetH3_2: H3.2 R5.1 R6.2 | length 451.6
  Top Layer w19.68: H3.2 580,1045 600,1065 698.94,1065 R6.2 795.2,1063.94 R5.1
NetH5_2: H5.2 R18.1 R22.2 U3.1 | length 837.2
  Top Layer w15.75: U3.1@320,2197.68 U3.1 320,1945 400,1865 476,1865 H5.2 534,1866 605,1795 715,1795 R18.1@735,1775 ; R22.2 736.06,1675.61 R18.1
NetH5_3: H5.3 R17.1 R21.2 U2.1 | length 575.7
  Top Layer w15.75: H5.3 561.06,2050.06 ; U2.1@540,2197.68 561.06,2176.61 561.06,2050.06 ; R21.2@731.06,1874.09 R17.1 ; R17.1@736.06,1978.59 685.66,2029 582.13,2029 561.06,2050.06
NetQ1_1: Q1.1 R3.1 | length 75.3
  Top Layer w20: Q1.1 893.86,1347.6 R3.1
NetQ2_1: Q2.1 R9.1 | length 80.3
  Top Layer w19.68: Q2.1 898.86,912.6 R9.1
Rx: H2.2 R12.1 U1.27 | length 1185.3
  Top Layer w11.81: U1.27 2190,2015 2255,2080 H2.2
  Top Layer w20: H2.2 2180,2365 2180,2540 2270,2630 R12.1
SCL: H6.2 R7.1 U1.34 | length 905.4
  Top Layer w19.68: U1.34 2080,2715 2260,2895 H6.2 2260,3243.94 2286.06,3270 R7.1@2301.06,3270
SDA: H6.1 R8.1 U1.35 | length 920.3
  Top Layer w20: U1.35 2040,2815 2155,2930 2155,3325 2195,3365 R8.1@2291.06,3365
Tx: H2.3 R10.1 U1.26 | length 1249.3
  Top Layer w11.81: U1.26 2245,1915 2340,2010 H2.3@2340,2290
  Top Layer w20: H2.3@2340,2290 2245,2385 2245,2515 2280,2550 R10.1
pads on no net: U1.1 U1.2 U1.3 U1.4 U1.5 U1.6 U1.15 U1.16 U1.17 U1.21 U1.22 U1.23 U1.24 U1.25 U1.28 U1.29 U1.30 U1.31 U1.32 U1.33 U1.36 U1.37 U1.38

## Polygon pours and split planes (outlines as drawn)
GND on Bottom Layer "Top Layer-No Net" (solid, remove dead copper, pour order 2): -25,3680 -25,35 2735,35 2735,3680
GND on Top Layer "Top Layer-No Net" (solid, remove dead copper, pour order 4): -25,3680 -25,0 2760,0 2760,3680

## Keep-outs
Top Layer:
  region: 1500,975 1795,975 1805,965 1805,680 1780,655 1515,655 1495,675 1495,970
Keep-Out Layer:
  lines w10: 0,0 0,3645 2760,3645 2760,0 70,0 0,0

## Other copper
Top Layer:
  region net GND: 1500,965 1790,965 1790,680 1775,665 1520,665 1500,685
  region net NetC9_2: 1520,1205 1510,1195 1510,1095 1530,1075 1570,1075 1580,1065 1580,1015 1570,1005 1520,1005 1520,985 1690,985 1700,995 1700,1205
  region net NetC9_1: 1500,1205 1500,1090 1525,1065 1560,1065 1570,1055 1570,1025 1560,1015 1500,1015 1500,1050 1450,1100 1450,1205
  region net +3.3V: 1390,1040 1390,1020 1365,995 1255,995 1235,1015 1235,1040
  region net NetC12_1: 1285,1060 1390,1060 1405,1060 1420,1045 1420,1020 1470,1020 1470,1045 1425,1090 1390,1090 1390,1155 1305,1155 1285,1135
  region net +3.3V: 2005,695 2005,1155 1965,1195 1820,1195 1820,680 1835,665 1865,665 1875,655 1875,500 1845,470 1650,470 1625,445 1625,295 1630,295 1655,270 1980,270 2000,290 2000,295 2005,300
  region net +3.3V: 2415,2255 2425,2245 2510,2245 2510,2335 2505,2340 2490,2340 2475,2355 2475,2375 2475,2660 2415,2660 2415,2380
  region net +3.3V: 2435,2925 2435,2955 2420,2970 2420,3185 2339.8,3265.2 2339.8,3375 2395,3375 2395,3290 2485,3200 2485,3040 2480,3035 2475,3030 2475,2925
  region net GND: 1400.2,1155 1400.2,1115.2 1400,1115 1405,1110 1435,1110 1440,1115 1440,1154.8 1439.8,1155
  region net +24V: 1465,1002.5 1460,1007.5 1400,1007.5 1315,922.5 1315,730 1290,705 672.5,705 490,522.5 490,395 510,370 650,370 675,395 675,502.5 755,582.5 1005,582.5 1035,552.5 1055,532.5 1055,367.5 1075,347.5 1200,347.5 1235,382.5 1235,565 1265,597.84 1442.43,597.84 1470,630 1470,1007.5 1455,1007.5

## Silkscreen, mask and mechanical layers (free items; w line width, h text height)
Top Overlay:
  lines w10: 2050,545 2550,545 2550,2125 2070,2125 2050,2125 2050,2105 2050,545
  text "BUTTON" at 525,3320 h51.18 r270
  text "OLED" at 2060,2905 h51.18
  text "GND" at 530,2865 h31.5 r270
  text "LIMIT" at 571,2047 h51.18 r270
  text "LoadCell" at 2110,2045 h51.18
  text "+" at 529,1529 h31.5 r270
  text "PULSE" at 593,1444 h51.18 r270
  text "+" at 538,1137 h31.5 r270
  text "DIR" at 593,1003 h51.18 r270
  text "+24V_In" at 360,605 h51.18
  text "+24V_Out" at 900,605 h51.18
  text "+3V3_Out" at 1475,605 h51.18
  text "+" at 1260,575 h31.5 r270
  text "+" at 1820,575 h31.5 r270
  text "+" at 700,570 h31.5 r270
Bottom Overlay:
  text "LAB_COATING_COF" at 2480,1735 h100 r90
Mechanical 20:
  drawing of 215 lines, arcs and shapes, not listed
  text "Layer" at -739.66,4890 h60
  text "Name" at -329.74,4890 h60
  text "Material" at 600,4890 h60
  text "Thickness" at 1459.77,4890 h60
  text "Constant" at 2109.6,4890 h60
  text "Board Layer Stack" at 2679.46,4890 h60
  text "1" at -739.66,4770 h60
  text "Top Overlay" at -329.74,4770 h60
  text "2" at -739.66,4650 h60
  text "Top Solder" at -329.74,4650 h60
  text "Solder Resist" at 600,4650 h60
  text "0.40mil" at 1459.77,4650 h60
  text "3.5" at 2109.6,4650 h60
  text "3" at -739.66,4530 h60
  text "Top Layer" at -329.74,4530 h60
  text "Copper" at 600,4530 h60
  text "1.40mil" at 1459.77,4530 h60
  text "4" at -739.66,4410 h60
  text "Dielectric 1" at -329.74,4410 h60
  text "FR-4" at 600,4410 h60
  text "10.00mil" at 1459.77,4410 h60
  text "4.2" at 2109.6,4410 h60
  text "5" at -739.66,4290 h60
  text "Bottom Layer" at -329.74,4290 h60
  text "Copper" at 600,4290 h60
  text "1.40mil" at 1459.77,4290 h60
  text "6" at -739.66,4170 h60
  text "Bottom Solder" at -329.74,4170 h60
  text "Solder Resist" at 600,4170 h60
  text "0.40mil" at 1459.77,4170 h60
  text "3.5" at 2109.6,4170 h60
  text "7" at -739.66,4050 h60
  text "Bottom Overlay" at -329.74,4050 h60
  text "2760 (mil)" at 1109.99,3725 h60
  text "1880.007 (mil)" at 2918.84,1864.88 h60 r270.15
  text "3645 (mil)" at -130,1549.99 h60 r90